# Altium PCB Noise Toaster.PcbDoc (part 2 of 2)
Units mil, origin at the board's own origin, x right, y up, seen from the top; angles counter-clockwise.
Board outline 1500 x 4200 mil, 2 copper layers (Top Layer, Bottom Layer), stack 30.756 mil thick; 110 components, 78 nets, 318 pads, 72 vias.
Unrouted connection lines stored in the file: 64.
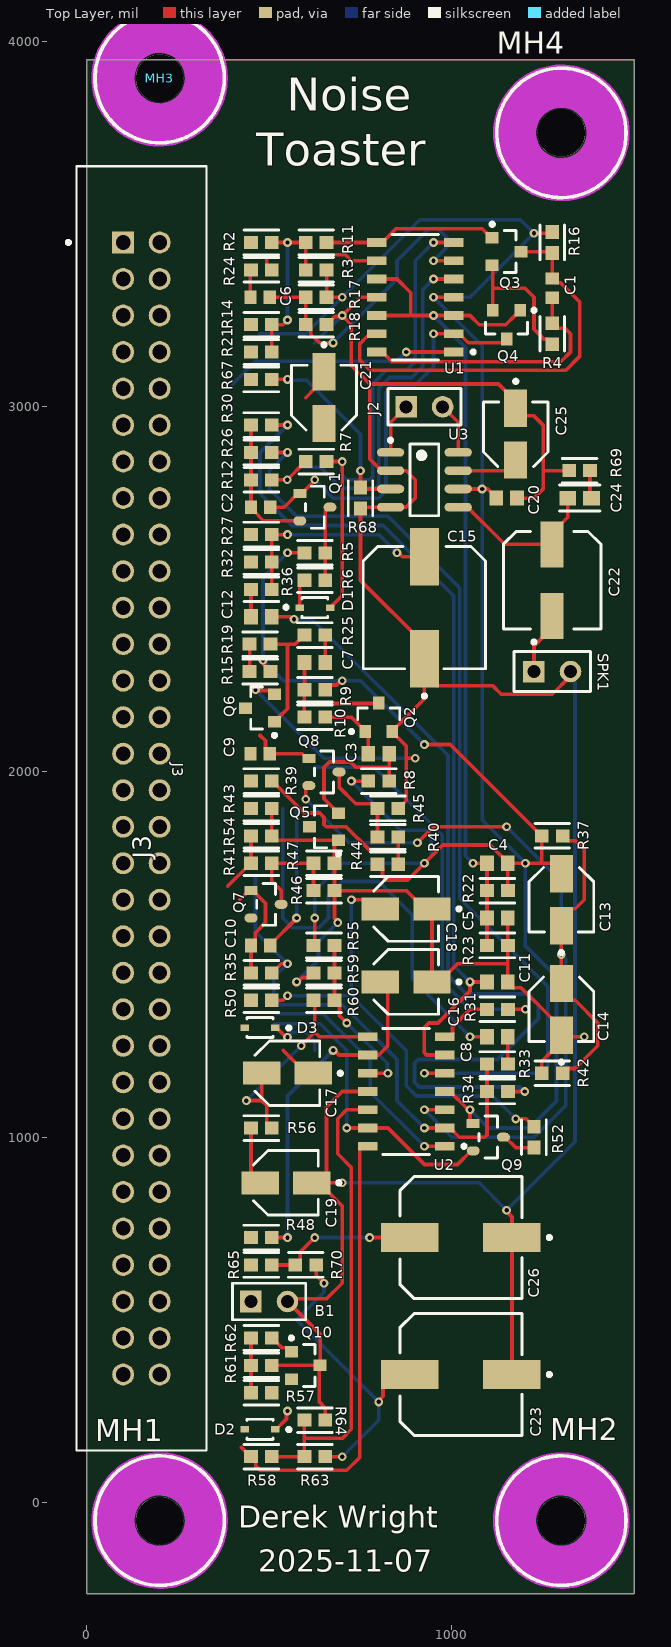
[diagram p0: Top Layer view]

## Part data (continued)
R21: library part CMP-08839-001611-1, "36kΩ ±5% 0.25W 0603 Anti-Surge Chip Resistor AEC-Q200", Case Code (Imperial)=0603, Case Code (Metric)=1608, Max Operating Temperature=155°C, Max Power Dissipation=250mW, Min Operating Temperature=-55°C, Package Quantity=5000, Resistance=36K, Resistor Type="Thick Film", Temperature Coefficient=200ppm/°C, Tolerance=5%, Case/Package=0603, Features="Automotive AEC-Q200", Height=0.022inch, Length=0.063inch, Number of Terminations=2, Packaging="Cut Tape", RoHS Compliant=Yes, Series=ESR, Width=0.031inch
R22 R23 R37 R42 R54: library part CMP-08839-007853-1, "4.7kΩ ±5% 0.25W 0603 Anti-Surge Chip Resistor AEC-Q200", Case Code (Imperial)=0603, Max Operating Temperature=155°C, Max Power Dissipation=250mW, Min Operating Temperature=-55°C, Package Quantity=5000, Resistance=4.7K, Resistor Type="Thick Film", Temperature Coefficient=200ppm/°C, Tolerance=5%, Case/Package=0603, Features="Automotive AEC-Q200", Height=0.022inch, Length=0.063inch, Number of Terminations=2, Packaging="Tape and Reel", RoHS Compliant=Yes, Series=ESR, Width=0.031inch
R27 R36: library part CMP-08839-028279-1, "47kΩ ±5% 0.25W 0603 Anti-Surge Chip Resistor AEC-Q200", Case Code (Imperial)=0603, Case Code (Metric)=1608, Max Operating Temperature=155°C, Max Power Dissipation=250mW, Min Operating Temperature=-55°C, Package Quantity=1, Resistance=47K, Resistor Type="Thick Film", Temperature Coefficient=200ppm/°C, Tolerance=5%, Case/Package=0603, Features="Automotive AEC-Q200", Height=0.022inch, Length=0.063inch, Number of Terminations=2, Packaging="Tape and Reel", RoHS Compliant=Yes, Series=ESR, Width=0.031inch
R33 R35: library part CMP-08839-028926-1, "4.7MΩ ±5% 0.25W 0603 Anti-Surge Chip Resistor AEC-Q200", Case Code (Imperial)=0603, Case Code (Metric)=1608, Max Operating Temperature=155°C, Max Power Dissipation=250mW, Min Operating Temperature=-55°C, Package Quantity=5000, Resistance=4.7M, Resistor Type="Thick Film", Temperature Coefficient=200ppm/°C, Tolerance=5%, Case/Package=0603, Features="Automotive AEC-Q200", Height=0.022inch, Length=0.063inch, Number of Terminations=2, Packaging="Cut Tape", RoHS Compliant=Yes, Series=ESR, Width=0.031inch
R34: library part CMP-08839-028673-1, "3MΩ ±5% 0.25W 0603 Anti-Surge Chip Resistor AEC-Q200", Case Code (Imperial)=0603, Case Code (Metric)=1608, Max Operating Temperature=155°C, Max Power Dissipation=250mW, Min Operating Temperature=-55°C, Package Quantity=5000, Resistance=3M, Resistor Type="Thick Film", Temperature Coefficient=200ppm/°C, Tolerance=5%, Case/Package=0603, Features="Automotive AEC-Q200", Height=0.022inch, Length=0.063inch, Number of Terminations=2, Packaging="Tape and Reel", RoHS Compliant=Yes, Series=ESR, Width=0.031inch
R39 R40: library part CMP-08839-004997-1, "39kΩ ±5% 0.25W 0603 Anti-Surge Chip Resistor AEC-Q200", Case Code (Imperial)=0603, Case Code (Metric)=1608, Max Operating Temperature=155°C, Max Power Dissipation=250mW, Min Operating Temperature=-55°C, Package Quantity=5000, Resistance=39K, Resistor Type="Thick Film", Temperature Coefficient=200ppm/°C, Tolerance=5%, Case/Package=0603, Features="Automotive AEC-Q200", Height=0.022inch, Length=0.063inch, Number of Terminations=2, Packaging="Cut Tape", RoHS Compliant=Yes, Series=ESR, Width=0.031inch
R43: library part CMP-08839-028661-1, "27kΩ ±5% 0.25W 0603 Anti-Surge Chip Resistor AEC-Q200", Case Code (Imperial)=0603, Case Code (Metric)=1608, Max Operating Temperature=155°C, Max Power Dissipation=250mW, Min Operating Temperature=-55°C, Package Quantity=5000, Resistance=27K, Resistor Type="Thick Film", Temperature Coefficient=200ppm/°C, Tolerance=5%, Case/Package=0603, Features="Automotive AEC-Q200", Height=0.022inch, Length=0.063inch, Number of Terminations=2, Packaging="Cut Tape", RoHS Compliant=Yes, Series=ESR, Width=0.031inch
R48 R65 R70: library part CMP-08839-028498-1, "3kΩ ±5% 0.25W 0603 Anti-Surge Chip Resistor AEC-Q200", Case Code (Imperial)=0603, Case Code (Metric)=1608, Max Operating Temperature=155°C, Max Power Dissipation=250mW, Min Operating Temperature=-55°C, Package Quantity=5000, Resistance=3K, Resistor Type="Thick Film", Temperature Coefficient=200ppm/°C, Tolerance=5%, Case/Package=0603, Features="Automotive AEC-Q200", Height=0.022inch, Length=0.063inch, Number of Terminations=2, Packaging="Tape and Reel", RoHS Compliant=Yes, Series=ESR, Width=0.031inch
R50: library part CMP-08839-006118-1, "820Ω ±5% 0.25W 0603 Anti-Surge Chip Resistor AEC-Q200", Case Code (Imperial)=0603, Case Code (Metric)=1608, Max Operating Temperature=155°C, Max Power Dissipation=250mW, Min Operating Temperature=-55°C, Package Quantity=5000, Resistance=820R, Resistor Type="Thick Film", Temperature Coefficient=200ppm/°C, Tolerance=5%, Case/Package=0603, Features="Automotive AEC-Q200", Height=0.022inch, Length=0.063inch, Number of Terminations=2, Packaging="Cut Tape", RoHS Compliant=Yes, Series=ESR, Width=0.031inch
R57: library part CMP-08839-005791-1, "200Ω ±5% 0.25W 0603 Anti-Surge Chip Resistor AEC-Q200", Case Code (Imperial)=0603, Case Code (Metric)=1608, Max Operating Temperature=155°C, Max Power Dissipation=250mW, Min Operating Temperature=-55°C, Package Quantity=5000, Resistance=200R, Resistor Type="Thick Film", Temperature Coefficient=200ppm/°C, Tolerance=5%, Case/Package=0603, Features="Automotive AEC-Q200", Height=0.022inch, Length=0.063inch, Number of Terminations=2, Packaging="Tape and Reel", RoHS Compliant=Yes, Series=ESR, Width=0.031inch
R63 R64: library part CMP-08839-028438-1, "150kΩ ±5% 0.25W 0603 Anti-Surge Chip Resistor AEC-Q200", Case Code (Imperial)=0603, Case Code (Metric)=1608, Max Operating Temperature=155°C, Max Power Dissipation=250mW, Min Operating Temperature=-55°C, Package Quantity=1, Resistance=150K, Resistor Type="Thick Film", Temperature Coefficient=200ppm/°C, Tolerance=5%, Case/Package=0603, Features="Automotive AEC-Q200", Height=0.022inch, Length=0.063inch, Number of Terminations=2, Packaging="Cut Tape", RoHS Compliant=Yes, Series=ESR, Width=0.031inch
R68: library part CMP-08839-028532-1, "20kΩ ±5% 0.25W 0603 Anti-Surge Chip Resistor AEC-Q200", Case Code (Imperial)=0603, Case Code (Metric)=1608, Max Operating Temperature=155°C, Max Power Dissipation=250mW, Min Operating Temperature=-55°C, Package Quantity=5000, Resistance=20K, Resistor Type="Thick Film", Temperature Coefficient=200ppm/°C, Tolerance=5%, Case/Package=0603, Features="Automotive AEC-Q200", Height=0.022inch, Length=0.063inch, Number of Terminations=2, Packaging="Cut Tape", Series=ESR, Width=0.031inch
R69: library part CMP-08839-028230-1, "10Ω ±5% 0.25W 0603 Anti-Surge Chip Resistor AEC-Q200", Case Code (Imperial)=0603, Case Code (Metric)=1608, Max Operating Temperature=155°C, Max Power Dissipation=250mW, Min Operating Temperature=-55°C, Resistance=10R, Resistor Type="Thick Film", Temperature Coefficient=200ppm/°C, Tolerance=5%, Case/Package=0603, Features="Automotive AEC-Q200", Number of Terminations=2, Packaging="Tape and Reel", RoHS Compliant=Yes, Series=ESR
SPK1: "Loudspeaker", LatestRevisionDate=17-Jul-2002, LatestRevisionNote="Re-released for DXP Platform.", PackageReference=PIN2, Published=24-Mar-1999, Publisher="Altium Limited"
U1 U2: library part CMP-12131-000005-1, "IC OPAMP GP 4 CIRCUIT 14SO", Input Bias Current=0.02uA, Input Offset Voltage=2mV, Manufacturer=STMicroelectronics, Max Dual Supply Voltage=15V, Max Junction Temp=+150°C, Max Supply Voltage=30V, Min Dual Supply Voltage=1.5V, Min Supply Voltage=3V, Nominal Supply Current=0.7-1.5mA, Output Current Per Channel=20-50mA, Package=SO-14, Temperature="0°C to +70°C", Temperature Range High=+70°C, Temperature Range Low=0°C, Voltage Gain=100dB, Automotive=No, Bandwidth=1.3MHz, Category=IC, ComponentLink2Description=Datasheet, ComponentLink2URL=https://www.st.com/content/ccc/resource/technical/document/datasheet/bd/fc/46/43/26/8f/40/7f/CD00001046.pdf/files/CD00001046.pdf/jcr:content/translations/en.CD00001046.pdf, Device Class L1="Integrated Circuits (ICs)", Device Class L2="Linear ICs", Device Class L3="Amplifiers - Op Amps", Digikey Description="IC OPAMP GP 4 CIRCUIT 14SO", Footprint Url=https://www.st.com/content/ccc/resource/technical/document/datasheet/group3/10/8a/e6/12/f8/e8/49/ce/DM00366438/files/DM00366438.pdf/jcr:content/translations/en.DM00366438.pdf, Gain Bandwidth=1.3MHz, Height=1.75mm, Lead Free=Yes, Manufacturer Part Number=LM324DT, Mouser Description="LM324 Series 32 V 1.3 MHz Low Power Quad Operational Amplifier - SOIC-14", Number Of Channels=4, Octopart=https://octopart.com/lm324dt-stmicroelectronics-39579146, RoHS=TRUE, Standoff Height=0.1mm
U3: library part CMP-0994-00003-1, "Low Voltage Audio Power Amplifier, 0 to 70 degC, 8-pin SOIC (D8), Green (RoHS & no Sb/Br)", Manufacturer="Texas Instruments", Code_JEDEC=MS-012, ComponentLink1Description="Manufacturer URL", ComponentLink1URL=http://www.ti.com/, ComponentLink2Description=Datasheet, ComponentLink2URL=http://www.ti.com/general/docs/lit/getliterature.tsp?genericPartNumber=LM386&fileType=pdf, ComponentLink3Description="Package Specification", ComponentLink3URL=http://www.ti.com/litv/pdf/msoi002j, DatasheetVersion=SNAS545A, Eco-Plan="Green (RoHS & no Sb/Br)", Input Type=Analog, Max. Number of Speaker Outputs=1, Mounting Technology="Surface Mount", PackageDescription="8-Pin Plastic Small Outline, Body 4.9 x 3.9 mm, Pitch 1.27 mm", PackageReference=D8, PackageVersion="4040047-3/M, 06/2011", PartNumber=LM386MX-1/NOPB, SubFamily="Mid/High-Power Amplifier"

## Via types
v1: diameter 24, hole 12, Top Layer to Bottom Layer, 72 vias

## Nets (pads, with @x,y where several pads share a name; then routed paths per layer and width w, separated by ;. In a path a pad name is that pad's centre, name@x,y a point inside that pad or via, vN(x,y) a via of type N, cw(c..) or ccw(c..) an arc to the next point about the centre after c; other vN are vias at no path point)
GND: C13.1 C14.2 C15.2 J3.9 J3.16 J3.26 J3.27 Q8.2 R27.1 R32.1 R36.1 R37.1 R42.2 U2.3 | length 3412.1
  Top Layer w10: R36.1 507.24,2537.5 R27.1 v1(550,2650) ; v1(600,1925) 600,1953.94 600.44,1954.38 600.44,1955.75 607.29,1962.6 Q8.2 ; v1(850,2600) 853.79,2600 864.02,2589.76 C15.2 ; v1(905.91,1805.91) 950,1850 v1(1150,1850) ; v1(925,1075) U2.3 ; R42.2 1316.58,1187.96 1337.96,1187.96 1400,1250 1400,1312.5 1337.76,1374.74 1326.5,1374.74 1300,1401.23 C14.2 v1(1300,1500) C13.1 1300,1598.77 1326.5,1625.26 1337.76,1625.26 1362.5,1650 1362.5,1787.5 1337.96,1812.04 1316.58,1812.04 R37.1
  Bottom Layer w10: v1(550,2650) 800,2650 v1(850,2600) ; v1(600,1925) 719.09,1805.91 v1(905.91,1805.91) ; v1(925,1075) 1000,1000 1225,1000 1312.5,1087.5 1312.5,1487.14 1300,1499.64 v1(1300,1500) 1300,1700 v1(1150,1850)
J1.1: C21.1 J3.14 | length 91.6
  Top Layer w10: 600,3025 623.5,3048.5 623.5,3069.37 C21.1
J1.2: J3.15 R67.2
LED1.1: J3.53 R65.1 | length 0.9
  Top Layer w10: R65.1@449.09,650 R65.1
LED1.2: C17.2 J3.5 J3.49 J3.50 J3.51 J3.54 R56.1 R60.2 U2.8 | length 725.8
  Top Layer w10: v1@437.85,1100.35 479.13,1100.35 ; C17.2 479.13,1100.35 ; R56.1@493.38,1012.04 R56.1@506.34,1025 ; R56.1 R56.1@506.34,1025 ; v1(587.5,1250) 625,1287.5 ; R60.2 625,1371.38 625,1287.5 ; U2.8 637.5,1275 625,1287.5 ; 479.13,1100.35 493.38,1086.11 493.38,1037.96 R56.1@506.34,1025
  Bottom Layer w10: v1(437.5,1100) v1(587.5,1250)
NetC1_1: C1.1 Q3.3 R16.1 U1.13 | length 1140.7
  Top Layer w10: U1.13 787.88,3193.19 768.19,3193.19 748.43,3173.43 748.43,3126.57 775,3100 1312.5,3100 1350,3137.5 1350,3287.5 1297.66,3339.84 1286.73,3339.84 C1.1 R16.1 1271.38,3425 Q3.3
NetC1_2: C1.2 R4.1 U1.14 | length 734.9
  Top Layer w10: U1.14 809.45,3150 836.45,3123 1298,3123 1325,3150 1325,3200 1310.24,3214.76 1287.96,3214.76 1275,3227.72 R4.1 C1.2
NetC2_1: C2.1 Q1.1 Q4.3 U1.2 | length 1111.6
  Top Layer w10: C2.1@503.15,2725 540.88,2725 578.28,2762.4 Q1.1 589.05,2762.4 625,2798.36 v1(625,2800) ; v1(950,3200) U1.2 1020.08,3200 1045.08,3175 1139.37,3175 Q4.3
  Bottom Layer w10: v1(625,2800) 675,2750 800,2750 820,2770 820,3040 840,3060 900,3060 950,3110 v1(950,3200)
NetC3_1: C3.1 Q5.2 R8.2 | length 408.6
  Top Layer w10: Q5.2 687.4,1887.4 676.65,1898.15 676.65,1900.12 650,1926.77 650,2012.5 664.91,2027.41 722.59,2027.41 737.54,2012.46 828.62,2012.46 ; C3.1 828.62,2049.92 828.62,2012.46 ; R8.2 828.62,2012.46
NetC3_2: C3.2 Q2.1 R10.2 | length 190.7
  Top Layer w10: R10.2 725.2,2150 762.6,2112.6 Q2.1 771.46,2101.77 C3.2
NetC6_2: C6.2 R17.1 R18.2 U1.6 | length 891.9
  Top Layer w10: C6.2 R17.1 R18.2 600.91,3225 613.86,3212.04 613.86,3198.64 637.5,3175 v1(675,3175) ; v1(950,3400) U1.6
  Bottom Layer w10: v1(675,3175) 850,3350 850,3400 937.5,3487.5 962.5,3487.5 987.5,3462.5 987.5,3437.5 v1(950,3400)
NetC7_1: C7.1 R25.1 | length 75
  Top Layer w10: C7.1 653.54,2374.92 R25.1
NetC7_2: C7.2 Q2.3 R9.1 R10.1 | length 354.4
  Top Layer w10: R10.1 596.38,2187.5 ; C7.2 596.46,2225.08 R9.1 596.38,2187.5 ; Q2.3 798.13,2187.5 596.38,2187.5
NetC8_2: C8.2 R33.1 | length 75
  Top Layer w10: C8.2 1153.62,1274.92 R33.1
NetC9_1: C9.1 R33.2 R34.2 R35.1 U2.2 | length 1440.6
  Top Layer w10: R35.1 508.15,1450 532.86,1474.71 549.71,1474.71 v1(550,1475) ; v1(925,1025) 995.08,1025 1020.08,1000 1090.52,1000 1096.38,1005.86 R33.2
  Bottom Layer w10: 462.5,1712.5 462.5,1562.5 v1(550,1475) 512.5,1437.5 512.5,1380.86 530.86,1362.5 700,1362.5 850,1212.5 850,1100 v1(925,1025)
NetC11_2: C11.2 R30.2 U2.6 | length 2342.3
  Top Layer w10: R30.2 v1(550,2950) ; U2.6 930.86,1225 925,1230.86 925,1300 937.5,1312.5 962.5,1312.5 1050,1400 v1@1050,1419.14 ; v1(1050,1425) C11.2
  Bottom Layer w10: v1(550,2950) 475,2875 475,2775.82 477,2773.82 477,2760.5 562.5,2675 812.5,2675 1005.5,2482 1005.5,1469.5 v1(1050,1425)
NetC12_2: C12.2 R34.1 | length 2362.6
  Top Layer w10: C12.2 557.63,2425 564.12,2418.5 v1(567.91,2418.5) ; R34.1 v1(1200,1125)
  Bottom Layer w10: v1(567.91,2418.5) 616.73,2418.5 989.5,2045.74 989.5,1442.39 1039.89,1392 1208,1392 1237.5,1362.5 1237.5,1325 1125,1212.5 908.5,1212.5 898,1202 898,1150 910.5,1137.5 1185.64,1137.5 1198.14,1125 v1(1200,1125)
NetC16_2: C16.2 R48.2 U2.9 | length 956.2
  Top Layer w10: R48.2 v1(550,725) ; v1(675,1237.5) 678.79,1237.5 691.29,1225 800,1225 825,1250 825,1404.13 C16.2
  Bottom Layer w10: v1(550,725) 550,1112.5 v1(675,1237.5)
NetC18_2: C18.2 R50.2 R52.1 | length 1280.6
  Top Layer w10: R50.2 537.5,1375 v1(550,1387.5) ; v1(725,1650) 779.13,1650 C18.2 ; v1(1175,1050) 1203.62,1050 1211.14,1042.48 1212.04,1042.48 1225,1029.53 R52.1
  Bottom Layer w10: v1(550,1387.5) 725,1387.5 ; v1(725,1650) 725,1387.5 ; v1(1175,1050) 1112.5,1112.5 903.5,1112.5 875,1141 875,1237.5 725,1387.5
NetC22_1: C22.1 SPK1.1 | length 172.3
  Top Layer w10: SPK1.1 1225,2345.08 1275,2395.08 C22.1
NetC22_2: C22.2 C24.2 U3.5 | length 443.7
  Top Layer w10: U3.5 1043.11,2725 1144.69,2623.43 C22.2 1275,2654.92 1317.44,2697.36 C24.2
NetC24_1: C24.1 R69.2 | length 76.6
  Top Layer w10: R69.2 1378.62,2753.94 C24.1
NetC25_2: C25.2 U3.7 | length 171.1
  Top Layer w10: U3.7 1148.5,2825 1175,2851.5 C25.2
NetC26_2: C26.2 R65.2 R70.1 | length 422.1
  Top Layer w10: R65.2 R70.1 572.28,650 585.24,662.96 585.24,685.24 v1(625,725) ; v1(775,725) C26.2
  Bottom Layer w10: v1(625,725) v1(775,725)
NetD1_1: D1.1 R6.2 | length 80.3
  Top Layer w10: D1.1 583.46,2512.09 R6.2
NetD1_2: D1.2 R7.2 U1.7 | length 1385.7
  Top Layer w10: R7.2@658.15,2850 v1(700,2850) 700,2483.46 673.15,2456.61 673.15,2453.86 669.29,2450 D1.2 ; v1(950,3450) U1.7
  Bottom Layer w10: v1(700,2850) 700,2812.5 712.5,2800 775,2800 784,2809 784,3064 820,3100 876.18,3100 900,3123.82 900,3400 v1(950,3450)
NetJ2_1: J2.1 U3.1 | length 142.6
  Top Layer w10: U3.1 832.48,2957.48 J2.1
NetJ2_2: J2.2 U3.8 | length 142.6
  Top Layer w10: J2.2 1017.52,2957.48 U3.8
NetQ1_3: Q1.3 R5.1 R6.1 | length 206.1
  Top Layer w10: R6.1 R5.1 653.62,2713.66 664.97,2725 Q1.3
NetQ3_1: Q3.1 R11.2 U1.8 | length 479.3
  Top Layer w10: R11.2 U1.8 809.45,3450 846.95,3487.5 1083.56,3487.5 1097.91,3473.15 1099.88,3473.15 Q3.1
NetQ3_2: Q3.2 Q4.2 R4.2 | length 401.9
  Top Layer w10: Q3.2 1112.6,3385.63 1112.6,3325 ; Q4.2 1112.6,3325 ; R4.2 1275,3172.28 1262.04,3185.24 1252.26,3185.24 1225,3212.5 1225,3300 1200,3325 1112.6,3325
NetQ6_1: Q6.1 R19.2 R25.2 | length 331.4
  Top Layer w10: R19.2 550,2350 ; Q6.1 516.34,2137.6 527.09,2148.35 527.09,2150.31 550,2173.23 550,2350 ; R25.2 595.47,2375 570.47,2350 550,2350
NetQ7_3: Q7.3 R41.2 R46.2 R47.2 | length 311.2
  Top Layer w10: R41.2 507.24,1700.94 532.68,1675.51 Q7.3 ; R41.2@508.15,1750 R47.2 R46.2
NetQ8_3: Q8.3 R40.2 R45.2 | length 248.5
  Top Layer w10: Q8.3 691.34,1958.66 737.04,1912.96 783.42,1912.96 R45.2 R40.2
NetQ9_3: Q9.3 R52.2 | length 95.5
  Top Layer w10: Q9.3 1146.72,1000 1175.34,971.38 R52.2
NetQ10_1: Q10.1 R62.2 | length 69
  Top Layer w10: R62.2 508.15,450 535,423.15 549.88,423.15 Q10.1
NetR2_2: R2.2 R3.1 R11.1 R14.2 R21.2 U1.9 | length 704.6
  Top Layer w10: R21.2 R14.2 537.5,3225 v1(550,3237.5) ; R2.2 v1(550,3450) R11.1 600,3416.3 ; R3.1 600,3416.3 ; U1.9 725,3400 708.7,3416.3 600,3416.3
  Bottom Layer w10: v1(550,3237.5) v1(550,3450)
NetR7_1: R7.1 R12.2 U1.5 | length 1121.9
  Top Layer w10: R12.2 v1(549.09,2800) 599.09,2850 R7.1 ; v1(950,3350) U1.5
  Bottom Layer w10: v1(549.09,2800) 583.35,2834.25 640.75,2834.25 698.19,2776.81 789.31,2776.81 800,2787.5 800,3050 830,3080 890,3080 920,3110 920,3320 v1(950,3350)
NetR26_2: R26.2 U2.5 | length 2606.2
  Top Layer w10: R26.2 v1(550,2875) ; v1(925,1175) U2.5
  Bottom Layer w10: v1(550,2875) 500,2825 500,2775 575,2700 825,2700 1021.5,2503.5 1021.5,1653.5 1262.5,1412.5 1262.5,1196.16 1241.34,1175 v1(925,1175)
NetR31_2: R31.2 U2.7 | length 158.9
  Top Layer w10: U2.7 995.08,1275 1001.89,1281.81 1001.89,1301.89 1050,1350 R31.2
NetR39_2: R39.2 R40.1 R44.1 | length 511.8
  Top Layer w10: R39.2@508.15,1975 595.65,1887.5 638.09,1887.5 650,1875.59 650,1855.86 655.86,1850 710.55,1850 773.05,1787.5 850.82,1787.5 853.62,1784.7 ; R44.1@852.72,1747.2 R44.1 853.62,1784.7 ; R40.1 853.62,1784.7
NetR55_1: R55.1 R59.1 R60.1 U2.10 | length 466.5
  Top Layer w10: R55.1 R59.1 R60.1 679.53,1375 692.48,1362.04 692.48,1332.52 v1(712.5,1312.5) ; U2.10 v1(825,1175)
  Bottom Layer w10: v1(712.5,1312.5) 823,1202 823,1177 v1(825,1175)
NetR58_1: R58.1 R63.1 R64.2 U2.12 | length 1286.6
  Top Layer w10: R58.1 R63.1 596.38,175 ; R64.2 596.38,175 ; U2.12 711.82,1075 687.5,1050.68 687.5,954.59 725,917.09 725,200 700,175 596.38,175
NetR67_1: R67.1 R68.2 U3.3 | length 535.2
  Top Layer w10: R67.1 v1(550,3075) ; v1(750,2825) R68.2 753.62,2775 U3.3
  Bottom Layer w10: v1(550,3075) 552,3073 602,3073 750,2925 v1(750,2825)
R1.2: J3.2 R2.1
R13.2: J3.7 R14.1
R13.3: J3.8 J3.36 J3.46
R20.2: J3.10 R21.1
R20.3: J3.11 J3.12
R28.1: C9.2 J3.25 J3.29 J3.30 Q8.1 | length 173.3
  Top Layer w10: 475,2100 489.84,2085.16 489.84,2061.73 C9.2 590.68,2050 603.28,2037.4 Q8.1
R29.1: C10.1 J3.28 | length 404.8
  Top Layer w10: C10.1@503.15,1525 503.15,1526.97 575,1598.82 v1(575,1600)
  Bottom Layer w10: v1(575,1600) 575,1900
R38.1: J3.31 R43.2
R38.2: J3.32 R39.1
R38.3: J3.33 J3.35
R49.3: J3.52 R48.1 | length 39.9
  Top Layer w10: R48.1@436.14,738.86 R48.1@436.14,737.96 ; R48.1 449.09,725 R48.1@436.14,737.96 ; R48.1@450.37,724.63 449.47,724.63 R48.1@436.14,737.96
R51.1: J3.39 J3.40 J3.42 J3.43 R50.1
R51.3: D2.1 J3.41 | length 65.5
  Top Layer w10: D2.1 519.29,200 547.32,228.03 547.32,247.32 v1(550,250)
R53.3: D3.2 J3.44
R66.2: C21.2 J3.18 | length 56.8
  Top Layer w10: C21.2@623.5,3000 650,2973.5 C21.2
R66.3: J3.19 J3.37 Q7.2
S1.2: J3.13 J3.34 Q9.2 R41.1 R54.2 U2.13 | length 1008.2
  Top Layer w10: 386.59,1687.5 449.09,1750 R41.1 R54.2 ; v1(712.5,1025) U2.13 825,1025 925,925 1015.68,925 1053.28,962.6 Q9.2
  Bottom Layer w10: 514.5,1310.5 639.5,1310.5 712.5,1237.5 v1(712.5,1025)
S2.1: C6.1 J3.4 R24.2 | length 75.7
  Top Layer w10: C6.1 448.43,3373.43 R24.2
S3.1: C2.2 J3.20 Q1.2 R12.1 R26.1 R30.1 U1.1 | length 1034.4
  Top Layer w10: C2.2@438.27,2711.3 C2.2@450,2723.03 ; R30.1 R26.1 R12.1 C2.2 C2.2@450,2723.03 ; Q1.2 483.9,2687.6 471.42,2700.09 471.42,2701.61 C2.2@450,2723.03 ; v1(875,3150) U1.1
  Bottom Layer w10: 400,3062.5 462.5,3125 850,3125 v1(875,3150)
S3.2: C8.1 J3.21 R27.2 | length 1257.3
  Top Layer w10: R27.2@437.04,2637.04 R27.2 ; v1(1050,1275) C8.1
  Bottom Layer w10: 537.5,1900.68 537.5,1599.32 563.82,1573 635.5,1573 662.5,1600 662.5,1662.5 700,1700 800,1700 891.75,1608.25 891.75,1433.25 v1(1050,1275)
S3.3: J3.22 R31.1 R32.2 | length 1151.6
  Top Layer w10: R32.2@437.04,2562.04 R32.2 ; R31.1 v1(1201.57,1350)
  Bottom Layer w10: 625,2012.5 787.5,2012.5 973.5,1826.5 973.5,1426.5 1050,1350 v1(1201.57,1350)
S4.1: J3.23 Q6.3 R15.2 R19.1 | length 90.2
  Top Layer w10: R15.2@435.63,2264.25 R15.2 R19.1
S4.2: C12.1 J3.24 R36.2 | length 75
  Top Layer w10: C12.1 R36.2
S5.2: C10.2 J3.38 Q7.1 R35.2 U2.1 | length 960.7
  Top Layer w10: 419.62,1650 444.62,1675 Q7.1 455.38,1675 490,1640.38 490,1587.56 461.73,1559.29 461.73,1536.73 C10.2 R35.2 ; v1(925,975) U2.1
  Bottom Layer w10: 522.05,1337.5 648.31,1337.5 776.91,1208.91 776.91,1123.09 v1(925,975)
S7.1: C17.1 J3.45 J3.48 | length 108.1
  Top Layer w10: 538.68,1237.5 601.18,1175 C17.1
S8.1: J3.59 Q10.2 R57.2
S8.2: D2.2 D3.1 J3.60 | length 160.7
  Top Layer w10: D3.1 519.29,1300 543.19,1276.1 547.32,1276.1 v1(550,1273.43)
  Bottom Layer w10: v1(550,1273.43) 564.07,1287.5 600,1287.5 625,1262.5 625,1237.5
S8.3: J3.61 R58.2 U2.14 | length 1241.5
  Top Layer w10: 424.09,150 449.09,125 R58.2 462.76,112.24 462.76,99.74 475,87.5 712.5,87.5 748,123 748,961.27 748.11,961.38 748.11,968.19 754.92,975 U2.14
S9.3: C19.2 J3.47 R56.2 | length 161.3
  Top Layer w10: R56.2@449.09,1025 R56.2 450,900 C19.2
S10.2: J3.58 R57.1 R61.2 R62.1 | length 150.9
  Top Layer w10: R62.1@449.09,450 R62.1 R61.2 R57.1
S11.2: B1.1 J3.56
VCC: C4.1 C13.2 C20.2 C23.2 J3.3 J3.55 J3.57 Q9.1 R3.2 R5.2 R8.1 R9.2 R15.1 R16.2 R17.2 R22.2 R37.2 R44.2 R55.2 R63.2 R70.2 U1.4 U2.4 U3.6 | length 8301.7
  Top Layer w10: v1(483.08,2305.83) 485.76,2303.15 485.76,2292.86 489.76,2288.86 489.76,2287.96 502.72,2275 R15.1 ; v1(550,2600) R5.2 ; R55.2 625,1528.62 v1(625,1600) ; R70.2 628.62,621.38 v1(650,600) ; R63.2 v1(700,125) ; R9.2 666.58,2237.96 684.17,2237.96 696.21,2250 v1(700,2250) ; R3.2 R17.2 v1(700,3300) ; v1(725,1975) R8.1 ; R44.2 797.28,1747.2 810.24,1734.25 810.24,1714.76 820.86,1704.14 879.14,1704.14 v1(925,1750) 975,1800 1105.51,1800 1153.54,1751.97 C4.1 ; v1(800,275) 800,278.79 811.5,290.28 811.5,315.63 845.87,350 C23.2 ; v1(925,2075) 995.47,2075 1245.47,1825 R37.2 1246.38,1753.62 1250,1750 ; v1(950,3300) U1.4 ; U2.4 995.08,1125 1042.4,1077.68 1047.32,1077.68 v1(1050,1075) 1050,1044.82 1057.41,1037.4 Q9.1 ; U3.6 v1(1083.07,2775) 1098.43,2775 1121.46,2751.97 C20.2 ; R22.2 1153.62,1750 v1(1201.57,1750) 1250,1750 ; v1(1225,3475) 1271.38,3475 R16.2 ; C13.2 1300,1723.5 1273.5,1750 1250,1750
  Bottom Layer w10: 475,3200 600,3200 v1(700,3300) 912.5,3512.5 1187.5,3512.5 v1(1225,3475) 1050,3300 v1(950,3300) 1083.07,3166.93 v1(1083.07,2775) 1083.07,1868.5 v1(1201.57,1750) 1201.57,1523.43 1286.75,1438.25 1286.75,1099.25 1212.5,1025 1100,1025 v1(1050,1075) ; v1(550,2600) 483.08,2533.08 v1(483.08,2305.83) 538.91,2250 v1(700,2250) 750,2250 v1(925,2075) ; v1(625,1600) 625,1675 700,1750 v1(925,1750) 944,1769 944,1824 928,1840 860,1840 v1(725,1975) ; v1(650,600) 650,575 575,500 v1(800,275) 800,225 v1(700,125)
VEE: B1.2 C5.2 C11.1 C14.1 C15.1 C16.1 C18.1 C19.1 C20.1 C23.1 C25.1 C26.1 J3.1 J3.6 J3.17 Q2.2 Q5.1 Q6.2 Q10.3 R18.1 R23.1 R24.1 R42.1 R43.1 R45.1 R46.1 R47.1 R54.1 R59.2 R61.1 R64.1 R68.1 R69.1 SPK1.2 U1.11 U2.11 U3.2 U3.4 | length 9965.5
  Top Layer w10: v1(462.5,2225) 464.35,2223.15 503.62,2223.15 Q6.2 ; 487.5,3412.5 493.38,3406.62 493.38,3393.81 493.38,3387.96 506.34,3375 R24.1 ; R61.1 Q10.3 ; R43.1 R54.1 519.65,1812.6 Q5.1 678.62,1801.85 678.62,1600.17 687.5,1591.29 v1(687.5,1587.5) ; v1(575,1425) 578.79,1425 590.83,1437.04 608.42,1437.04 R59.2 ; C19.1 C19.1@636.42,875 ; Q10.3@641.34,375 Q10.3 ; R64.1 653.62,258.35 637.5,274.47 637.5,373.13 Q10.3 ; R18.1 658.15,3225 680.47,3247.32 697.32,3247.32 v1(700,3250) ; R46.1 876.18,1675 926.18,1625 C18.1 C16.1 965.55,1425 1015.51,1474.96 1153.54,1474.96 ; v1(700,875) C19.1@636.42,875 ; U2.11 700,1125 657,1082 657,895.58 C19.1@636.42,875 ; U1.11 750,3300 v1(700,3250) ; R45.1 854.53,1900 867.48,1912.96 867.48,1913.86 875,1921.38 875,2037.5 ; v1(900,2037.5) 875,2037.5 ; v1(1150,800) 1150,796.21 1164.76,781.45 C23.1 ; C5.2 1153.62,1599.92 R23.1 1153.54,1524.92 1153.54,1474.96 ; C20.1 1225,2750 1250,2775 1250,2825 ; R42.1 1246.38,1207.96 1271.38,1232.95 1273.5,1232.95 1300,1259.45 C14.1 ; R69.1 1250,2825 ; SPK1.2 1325,2262.5 1275,2212.5 1135.43,2212.5 1111.44,2236.5 959.37,2236.5 C15.1@925,2270.87 ; v1(1362.5,1275) 1304.13,1275 C14.1 ; C19.1@636.42,875 700,811.42 700,600 657.88,557.88 557.88,557.88 B1.2 639.37,460.63 Q10.3 ; v1(700,3250) 725,3225 725,3112.5 775,3062.5 ; 775,3062.5 1128.05,3062.5 1175,3015.55 C25.1 1195.87,2975 1225,2975 1250,2950 1250,2825 ; 775,3062.5 775,2856.89 807.38,2824.51 875.49,2824.51 900,2800 900,2750 875.49,2725.49 832.97,2725.49 U3.4 753.62,2725 R68.1 750,2524.61 925,2349.61 C15.1 C15.1@925,2270.87 ; 875,2037.5 875,2071.06 837.4,2108.66 837.4,2112.6 925,2200.2 C15.1@925,2270.87 ; 1153.54,1474.96 1153.54,1423.03 1167.24,1409.33 1189.44,1409.33 1273.45,1325.32 1273.5,1325.32 1300,1298.82 C14.1
  Bottom Layer w10: v1(462.5,2225) 650,2037.5 v1(900,2037.5) ; v1(575,1425) 635,1485 635,1535 v1(687.5,1587.5) ; 625,3175 v1(700,3250) ; v1(700,875) 1075,875 v1(1150,800) 1337.5,987.5 1337.5,1275 ; SPK1.2 1334.39,2265.61 1334.39,2247.73 1337.5,2244.61 1337.5,1275 ; v1(1362.5,1275) 1337.5,1275
VREF1: C4.2 C5.1 Q4.1 R22.1 R23.2 U1.3 U1.10 U1.12 | length 2399.6
  Top Layer w10: U1.12 887.5,3250 ; U1.10 850,3350 887.5,3312.5 887.5,3250 ; v1(1058.07,1750) C4.2 1096.46,1675.08 R22.1 1096.46,1674.92 C5.1 1096.46,1525.08 R23.2 ; Q4.1 1187.4,3262.4 1176.65,3251.65 1174.68,3251.65 1148.03,3225 1075,3225 1050,3250 U1.3 v1(950,3250) 887.5,3250
  Bottom Layer w10: v1(950,3250) 1037.5,3162.5 1037.5,1770.57 v1(1058.07,1750)
pads on no net: J3.62 J3.63 J3.64 MH1.1 MH2.1 MH3.1 MH4.1 Q5.3

## Polygon pours and split planes (outlines as drawn)
VEE on Bottom Layer "NONET_L02_P001" (solid, shelved, pour order 1): 0,-250 0,3950 1500,3950 1500,-250
VCC on Top Layer "NONET_L01_P002" (solid, shelved, pour order 2): 0,3950 1500,3950 1500,-250 0,-250

## Silkscreen, mask and mechanical layers (free items; w line width, h text height)
Top Overlay:
  text "Noise" at 547.57,3810 h90
  text "Toaster" at 465.09,3660 h90
  text "Derek Wright" at 415.11,-70.01 h60
  text "2025-11-07" at 470.09,-190 h60
Mechanical 1:
  the board outline again, w10